# EAGLE board SciGames_SlideBoard (EAGLE 6.2)
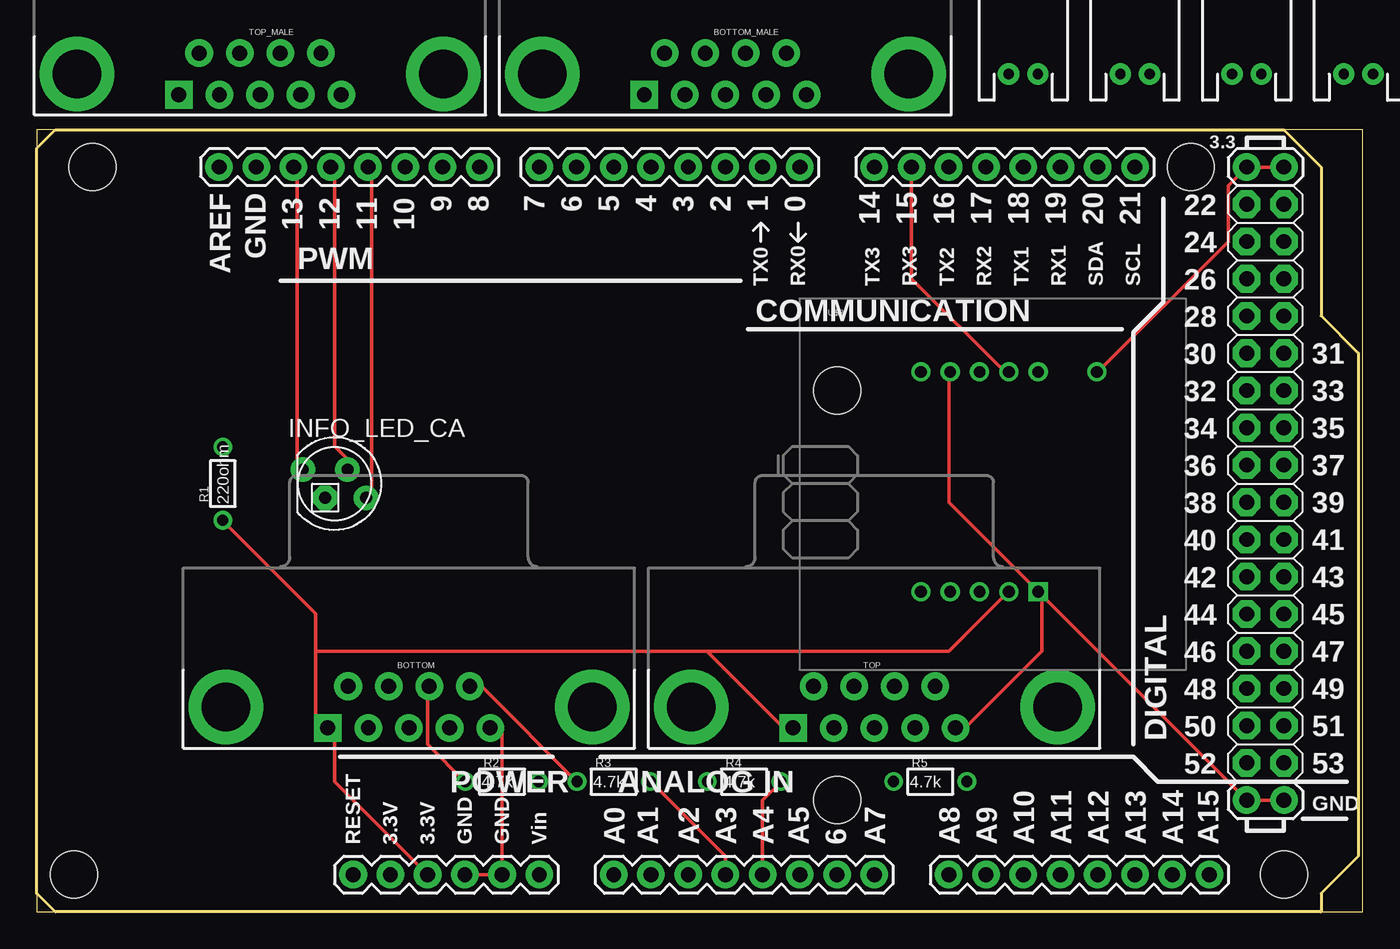
[diagram p0: board, top side]
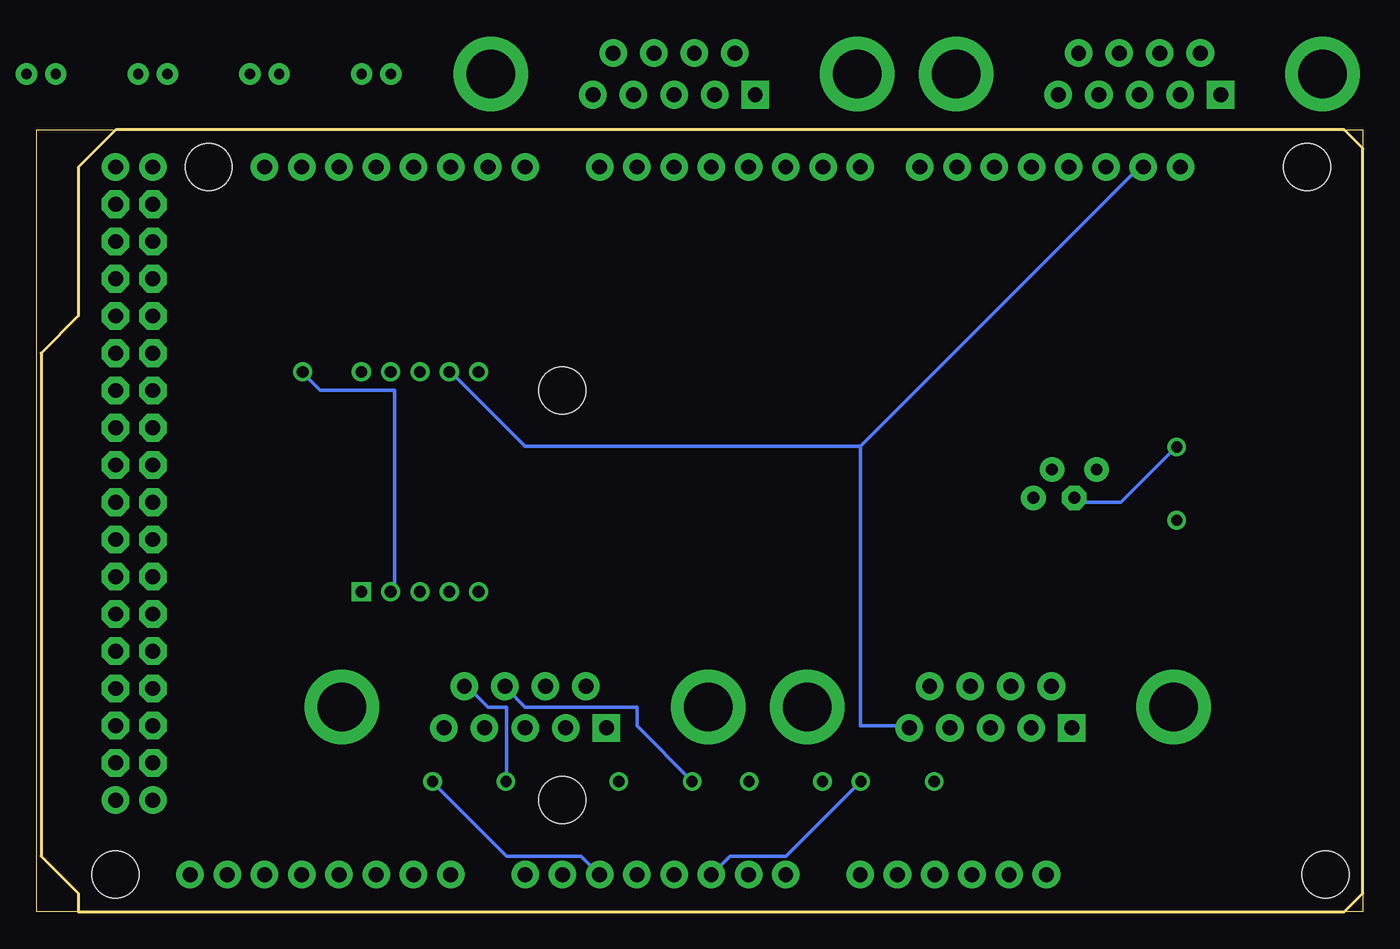
[diagram p1: board, bottom side, seen from below]

Size 90.47 x 53.34 mm. Coordinates in mm from the lower left corner, seen from the top.
Outline: 0,0 90.47,0 90.47,53.33 0,53.33 0,0
Copper layers (1*16): Top 0.035mm / dielectric 1.5mm / Bottom 0.035mm
Design rules: minimum track width 10mil, minimum drill 24mil, track to track 8mil, track to pad 8mil, pad to pad 8mil, via to via 8mil, smd to smd 8mil, copper to edge 40mil, drill to drill 8mil, minimum pad ring 10mil, minimum via ring 8mil, stop-mask expansion 4mil, vias tented up to drill 0mil, thermal gap 10mil

## Footprints (pad centres in the part's own frame; a part is rotated, then mirrored left to right if it is on the bottom)
DB9 = drill 1.016 pad 1.88 square: 1 -5.54,-1.42 | drill 1.016 pad 1.88: 2 -2.77,-1.42; 3 0,-1.42; 4 2.77,-1.42; 5 5.54,-1.42; 6 -4.15,1.42; 7 -1.38,1.42; 8 1.38,1.42; 9 4.15,1.42 | drill 3.302 pad 5.08: G1 -12.5,0; G2 12.5,0
DB9_MALE = drill 1.016 pad 1.88: 1 5.54,-1.42; 2 2.77,-1.42; 3 0,-1.42; 4 -2.77,-1.42; 6 4.15,1.42; 7 1.38,1.42; 8 -1.38,1.42; 9 -4.15,1.42 | drill 1.016 pad 1.88 square: 5 -5.54,-1.42 | drill 3.302 pad 5.08: G1 -12.5,0; G2 12.5,0
JST-2-PTH = drill 0.7 pad 1.448: 1 -1,0; 2 1,0
LED5MMRGB = drill 0.8 pad 1.676: 1 -2.159,0.968; 3 0.889,0.968; 4 2.159,-0.968 | drill 0.8 pad 1.676 octagon: 2 -0.635,-0.968
1/6W-RES = drill 0.762: 1 -2.5,0; 2 2.5,0
ARDUINO_MEGA-PRO-3.3V = drill 1.016 pad 1.88: 0 52.07,50.8; 1 49.53,50.8; 2 46.99,50.8; 3 44.45,50.8; 3.3V 24.13,2.54; 4 41.91,50.8; 5 39.37,50.8; 5V@0 26.67,2.54; 5V@1 82.55,50.8; 5V@2 85.09,50.8; 6 36.83,50.8; 7 34.29,50.8; 8 30.226,50.8; 9 27.686,50.8; 10 25.146,50.8; 11 22.606,50.8; 12 20.066,50.8; 13 17.526,50.8; 14 57.15,50.8; 15 59.69,50.8; 16 62.23,50.8; 17 64.77,50.8; 18 67.31,50.8; 19 69.85,50.8; 20 72.39,50.8; 21 74.93,50.8; A0 39.37,2.54; A1 41.91,2.54; A2 44.45,2.54; A3 46.99,2.54; A4 49.53,2.54; A5 52.07,2.54; A6 54.61,2.54; A7 57.15,2.54; A8 62.23,2.54; A9 64.77,2.54; A10 67.31,2.54; A11 69.85,2.54; A12 72.39,2.54; A13 74.93,2.54; A14 77.47,2.54; A15 80.01,2.54; AREF 12.446,50.8; GND@0 29.21,2.54; GND@1 31.75,2.54; GND@2 82.55,7.62; GND@3 85.09,7.62; GND@4 14.986,50.8; RESET 21.59,2.54; VIN 34.29,2.54 | drill 1.016 pad 1.88 octagon: 22 82.55,48.26; 23 85.09,48.26; 24 82.55,45.72; 25 85.09,45.72; 26 82.55,43.18; 27 85.09,43.18; 28 82.55,40.64; 29 85.09,40.64; 30 82.55,38.1; 31 85.09,38.1; 32 82.55,35.56; 33 85.09,35.56; 34 82.55,33.02; 35 85.09,33.02; 36 82.55,30.48; 37 85.09,30.48; 38 82.55,27.94; 39 85.09,27.94; 40 82.55,25.4; 41 85.09,25.4; 42 82.55,22.86; 43 85.09,22.86; 44 82.55,20.32; 45 85.09,20.32; 46 82.55,17.78; 47 85.09,17.78; 48 82.55,15.24; 49 85.09,15.24; 50 82.55,12.7; 51 85.09,12.7; 52 82.55,10.16; 53 85.09,10.16 | hole 3.2: 3.81,50.8; 2.54,2.54; 54.61,35.56; 54.61,7.62; 78.74,50.8; 85.09,2.54
ID-12 = drill 0.8 square: 1 16.255,5.32 | drill 0.8: 2 14.255,5.32; 3 12.255,5.32; 4 10.255,5.32; 5 8.255,5.32; 6 8.255,20.32; 7 10.255,20.32; 8 12.255,20.32; 9 14.255,20.32; 10 16.255,20.32; 11 20.255,20.32

## Placement (x,y rotation side)
BOTTOM  [DB9]  25.4,13.97 0 top
BOTTOM_MALE  [DB9_MALE]  46.99,57.15 0 top
FSR_1  [JST-2-PTH]  74.93,57.15 0 top  (outside the outline)
FSR_2  [JST-2-PTH]  67.31,57.15 0 top  (outside the outline)
FSR_3  [JST-2-PTH]  82.55,57.15 0 top  (outside the outline)
FSR_4  [JST-2-PTH]  90.17,57.15 0 top  (outside the outline)
INFO_LED_CA  RGBLED_CA-5MM  [LED5MMRGB]  20.32,29.21 0 top
R1  220ohm  [1/6W-RES]  12.7,29.21 90 top
R2  4.7k  [1/6W-RES]  31.75,8.89 0 top
R3  4.7k  [1/6W-RES]  39.37,8.89 0 top
R4  4.7k  [1/6W-RES]  48.26,8.89 0 top
R5  4.7k  [1/6W-RES]  60.96,8.89 0 top
TOP  [DB9]  57.15,13.97 0 top
TOP_MALE  [DB9_MALE]  15.24,57.15 0 top
U1  ARDUINO-MEGAPRO  [ARDUINO_MEGA-PRO-3.3V]  0,0 0 top
U$3  ID-12/20  [ID-12]  52.07,16.51 0 top

## Library data of the parts
BOTTOM BOTTOM_MALE FSR_1-FSR_4 TOP TOP_MALE = SparkFun-Connectors
INFO_LED_CA = adafruit
R1-R5 = SparkFun-Passives
U1 = SparkFun
U$3 = SparkFun-RF

## Nets
5V: BOTTOM.1 R1.1 TOP.1 U1.5V@0 U1.5V@1 U1.5V@2 U$3.2 U$3.11
GND: BOTTOM.5 TOP.5 U1.GND@0 U1.GND@1 U1.GND@2 U1.GND@3 U1.GND@4 U$3.1 U$3.7
N$1: U1.15 U$3.9
N$2: INFO_LED_CA.4 U1.11
N$3: INFO_LED_CA.3 U1.12
N$4: INFO_LED_CA.1 U1.13
N$5: INFO_LED_CA.2 R1.2
N$6: BOTTOM.8 R2.1
N$7: BOTTOM.9 R3.1
N$8: R4.1 TOP.8
N$9: R5.1 TOP.9
N$10: R5.2 U1.A5
N$11: R4.2 U1.A4
N$12: R3.2 U1.A3
N$13: R2.2 U1.A2

## Tracks (layer width: path | path; a pad name or v marks a point on that pad's centre or on a via)
5V
  Top 0.254: U1.5V@2 U1.5V@1 81.28,49.53 81.28,45.72 72.39,36.83 U$3.11 | 19.05,17.78 19.05,12.7 BOTTOM.1 20.32,12.7 20.32,8.89 U1.5V@0 | 19.05,17.78 19.05,20.32 12.7,26.67 R1.1 | 45.72,17.78 50.8,12.7 TOP.1 | 19.05,17.78 45.72,17.78 | 45.72,17.78 62.23,17.78 66.04,21.59 U$3.2
  Bottom 0.254: U$3.2 66.04,21.59 66.04,35.56 71.12,35.56 72.39,36.83 U$3.11
GND
  Top 0.254: U1.GND@0 U1.GND@1 31.75,12.7 BOTTOM.5 | U1.GND@3 U1.GND@2 68.58,21.59 | 68.58,21.59 62.23,27.94 62.23,36.83 U$3.7 | 68.58,21.59 68.58,17.78 63.5,12.7 TOP.5 | 68.58,21.59 U$3.1
  Bottom 0.254: 34.29,31.75 15.24,50.8 U1.GND@4 | 34.29,31.75 34.29,12.7 31.75,12.7 BOTTOM.5 | 34.29,31.75 57.15,31.75 62.23,36.83 U$3.7
N$1
  Top 0.254: U1.15 59.69,43.18 66.04,36.83 U$3.9
N$2
  Top 0.254: INFO_LED_CA.4 22.86,27.94 22.86,50.8 U1.11
N$3
  Top 0.254: INFO_LED_CA.3 21.59,30.48 20.32,31.75 20.32,50.8 U1.12
N$4
  Top 0.254: INFO_LED_CA.1 17.78,30.48 17.78,50.8 U1.13
N$5
  Top 0.254: 20.32,27.94 INFO_LED_CA.2
  Bottom 0.254: R1.2 12.7,31.75 16.51,27.94 19.05,27.94 INFO_LED_CA.2
N$6
  Top 0.254: R2.1 29.21,8.89 26.67,11.43 26.67,15.24 BOTTOM.8
N$7
  Top 0.254: R3.1 36.83,8.89 30.48,15.24 BOTTOM.9
N$8
  Bottom 0.254: R4.1 45.72,8.89 49.53,12.7 49.53,13.97 57.15,13.97 58.42,15.24 TOP.8
N$9
  Bottom 0.254: R5.1 58.42,8.89 58.42,13.97 59.69,13.97 60.96,15.24 TOP.9
N$10
  Bottom 0.254: U1.A5 53.34,3.81 58.42,3.81 63.5,8.89 R5.2
N$11
  Top 0.254: U1.A4 49.53,7.62 50.8,8.89 R4.2
N$12
  Top 0.254: U1.A3 46.99,3.81 41.91,8.89 R3.2
N$13
  Bottom 0.254: U1.A2 43.18,3.81 39.37,3.81 34.29,8.89 R2.2

## Text on the board
tValues: SciGames Slide Board